# EAGLE board coil_havester_board (EAGLE 9.5.1)
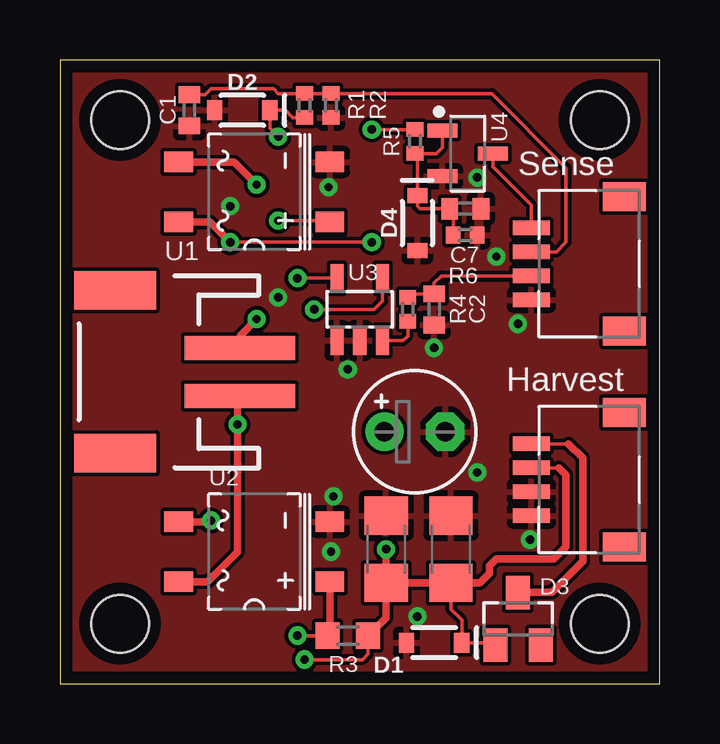
[diagram p0: board, top side]
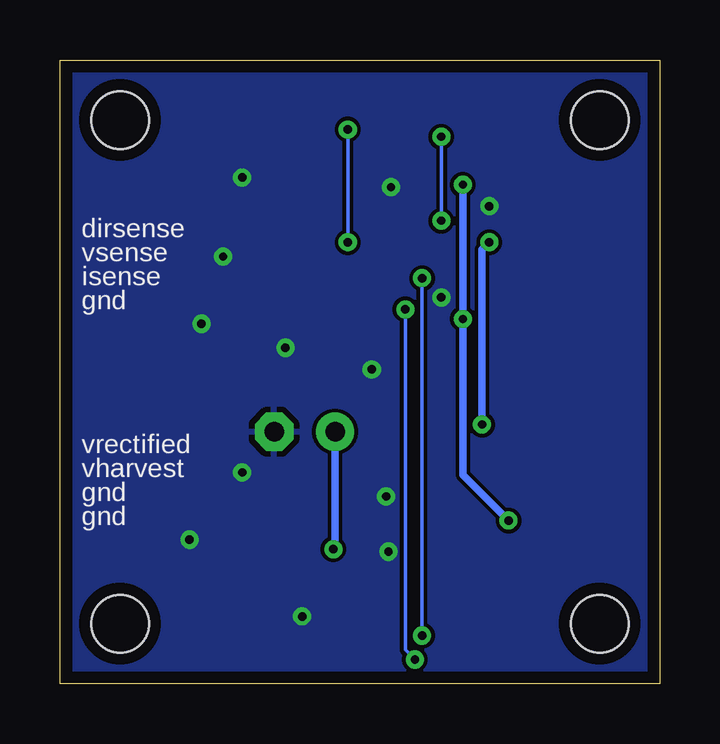
[diagram p1: board, bottom side, seen from below]

Size 25 x 26 mm. Coordinates in mm from the lower left corner, seen from the top.
Outline: 0,0 25,0 25,26 0,26 0,0
Copper layers (1*16): Top 0.035mm / dielectric 1.5mm / Bottom 0.035mm
Design rules "default *": minimum track width 6mil, minimum drill 0.35mm, track to track 6mil, track to pad 6mil, pad to pad 6mil, via to via 6mil, smd to smd 6mil, copper to edge 20mil, drill to drill 6mil, minimum pad ring 10mil, minimum via ring 8mil, stop-mask expansion 4mil, vias tented up to drill 0mil, thermal gap 10mil
Holes 2.4 mm at 2.5,23.5 2.5,2.5 22.5,2.5 22.5,23.5

## Footprints (pad centres in the part's own frame; a part is rotated, then mirrored left to right if it is on the bottom)
C0402 = smd 0.7 x 0.9: 1 -0.65,0; 2 0.65,0
C1206 = smd 1.6 x 1.8: 1 -1.4,0; 2 1.4,0
E2,5-5 = drill 0.813 pad 1.6: + -1.27,0 | drill 0.813 pad 1.6 octagon: - 1.27,0
SOD-323 = smd 0.63 x 0.83: A 1.15,0; C -1.15,0
SOT23 = smd 1 x 1.4: 1 -0.95,-1.1; 2 0.95,-1.1; 3 0,1.1
JST-2-SMD = smd 1 x 4.6: 1 -1,-3.7; 2 1,-3.7 | smd 1.6 x 3.4: NC1 -3.4,1.5; NC2 3.4,1.5
JST-SH-4 = smd 0.6 x 1.55: 1 -1.5,2.34; 2 -0.5,2.34; 3 0.5,2.34; 4 1.5,2.34 | smd 1.2 x 1.8: P-MOUNT1 -2.8,-1.535; P-MOUNT2 2.8,-1.535
R0402 = smd 0.6 x 0.7: 1 -0.5,0; 2 0.5,0
R0603 = smd 1 x 1.1: 1 -0.85,0; 2 0.85,0
CDBHDXX0L-G = smd 0.85 x 1.2: P$1 1.25,3.15; P$2 -1.25,3.15; P$3 -1.25,-3.15; P$4 1.25,-3.15
SOT23-5 = smd 0.55 x 1.2: 1 -0.95,-1.3; 2 0,-1.3; 3 0.95,-1.3; 4 0.95,1.3; 5 -0.95,1.3
TN2106K1-G = smd 1.24 x 0.589: D 1.056,0; G -1.056,0.95; S -1.056,-0.95

## Placement (x,y rotation side)
C1  1n  [C0402]  5.4,23.9 270 top
C2  1n  [C0402]  15.6,15.6 270 top
C3  [C1206]  13.6,5.6 90 top
C4  [C1206]  16.3,5.6 90 top
C5  DNP  [E2,5-5]  14.8,10.5 0 top
C7  10n  [C0402]  16.9,19.8 0 top
D1  3.3V  [SOD-323]  15.6,1.7 180 top
D2  3.3V  [SOD-323]  7.6,23.9 180 top
D3  BAT54  [SOT23]  19.1,2.7 0 top
D4  3.3V  [SOD-323]  14.9,19.2 270 top
J1  [JST-2-SMD]  3.8,13 90 top
JP2  JST-SH-4  [JST-SH-4]  22,8.5 90 top
JP3  JST-SH-4  [JST-SH-4]  22,17.5 90 top
R1  1M 1%  [R0402]  10.2,24.1 270 top
R2  150k 1%  [R0402]  11.3,24.1 90 top
R3  3.3 1%  [R0603]  12,2 0 top
R4  150k 1%  [R0402]  14.5,15.6 270 top
R5  10k  [R0402]  14.8,22.6 90 top
R6  150K 1%  [R0402]  16.9,18.7 180 top
U1  CDBHD140L-G  [CDBHDXX0L-G]  8.1,20.5 270 top
U2  CDBHD140L-G  [CDBHDXX0L-G]  8.1,5.5 270 top
U3  MAX9938  [SOT23-5]  12.5,15.6 0 top
U4  TN2106K1-G  [TN2106K1-G]  17,22.1 0 top

## Library data of the parts
C1 C2 = rcl; MFR: SAMSUNG; MFR_PN: CL05B102KB5NNNC; SPICEPREFIX: C
C3 C4 = rcl; MFR: TDK; MFR_PN: C3216X5R1E476M160AC; SPICEPREFIX: C
C5 = rcl; SPICEPREFIX: C
C7 = rcl; MFR: SAMSUNG; MFR_PN: CL05B103KB5NNNC; SPICEPREFIX: C
D1 D2 = SparkFun-DiscreteSemi; MFR: DIODES_INCORPORATED; MFR_PN: BZT52C15S; PROD_ID: DIO-11284
D3 = diode; MFR: ON; MFR_PN: BAT54
D4 = SparkFun-DiscreteSemi; MFR: DIODES_INCORPORATED; MFR_PN: BZT52C3V3S; PROD_ID: DIO-11284
J1 = SparkFun-Connectors; MFR: JST; MFR_PN: S2B-PH-SM4-TB(LF)(SN); PROD_ID: CONN-11443
JP2 JP3 = jst-sh; MFR: JST; MFR_PN: SM04B-SRSS-TB(LF)(SN)
R1 = rcl; MFR: YAGEO; MFR_PN: RC0402FR-071ML; SPICEPREFIX: R
R2 R4 R6 = rcl; MFR: YAGEO; MFR_PN: RC0402FR-07150KL; SPICEPREFIX: R
R3 = rcl; MFR: PANASONIC; MFR_PN: ERJ-3BQF3R3V; SPICEPREFIX: R
R5 = rcl; MFR: YAGEO; MFR_PN: RC0402FR-0710KL; SPICEPREFIX: R
U1 U2 = afig-0007; MFR: COMCHIP; MFR_PN: CDBHD140L-G
U3 = max9938; MFR: MAXIM; MFR_PN: MAX9938TEUK+T
U4 = tn2106; MFR: MICROCHIP; MFR_PN: TN2106K1-G

## Nets
DIRSENSE: JP3.4 U4.D
GND: C1.2 C2.2 C3.2 C4.2 C5.- C7.2 D1.A D2.A D4.A JP2.1 JP2.2 JP3.1 R2.1 R6.1 U1.P$2 U2.P$2 U3.1 U3.2 U4.S
ISENSE: C2.1 JP3.2 R4.1
N$1: J1.1 R5.2 U1.P$4 U2.P$4
N$2: J1.2 U1.P$3 U2.P$3
N$3: D2.C R1.2 U1.P$1
N$4: R3.1 U2.P$1 U3.5
N$6: R4.2 U3.3
N$7: C7.1 D4.C R5.1 R6.2 U4.G
VHARVEST: C3.1 C4.1 C5.+ D1.C D3.1 JP2.3 R3.2 U3.4
VHARVEST_R: D3.3 JP2.4
VSENSE: C1.1 JP3.3 R1.1 R2.2

## Tracks (layer width: path | path; a pad name or v marks a point on that pad's centre or on a via)
DIRSENSE
  Top 0.152: U4.D 18.06,21.54 19.66,19.94 JP3.4
GND  (via drill 0.35)
  other vias: 11.4,7.8 12,13.1 15.6,14 19.1,15 17.4,8.8 19.6,6 17.4,21.1 11.2,20.7 11.3,5.5 18.2,17.8 14.9,2.8 7.1,19.9 9.1,16.1
  pour Top: -1,27 26,27 26,-1 -1,-1
  pour Bottom: 26,27 -1,27 -1,-1 26,-1
ISENSE
  Top 0.152: R4.1 14.65,16.25 C2.1 15.6,16.7 15.9,17 JP3.2
N$1  (via drill 0.35)
  Top 0.152: R5.2 v13,23.1 | v7.1,18.4 v13,18.4
  Top 0.305: U2.P$4 6.15,4.25 7.4,5.5 v7.4,10.8 7.4,12 J1.1 | U1.P$4 6.25,19.25 v7.1,18.4
  Bottom 0.152: v13,18.4 v13,23.1
  Bottom 0.305: v7.1,18.4 7.4,18.1 v7.4,10.8
N$2  (via drill 0.35)
  Top 0.305: U1.P$3 7.25,21.75 v8.2,20.8 | U2.P$3 6.25,6.75 v6.3,6.8 | J1.2 7.5,14.5 v8.2,15.2
  Bottom 0.305: v6.3,6.8 8.2,8.7 v8.2,15.2 v8.2,20.8
N$3  (via drill 0.35)
  Top 0.152: U1.P$1 11.2,19.3 v9.1,19.3 | v9.1,22.8 8.75,23.15 D2.C 9.4,23.9 9.7,23.6 R1.2
  Bottom 0.152: v9.1,22.8 v9.1,19.3
N$4  (via drill 0.35)
  Top 0.152: R3.1 v9.9,2 | v9.9,16.9 U3.5
  Top 0.305: U2.P$1 11.25,2.1 R3.1
  Bottom 0.152: v9.9,2 v9.9,16.9
N$6
  Top 0.152: U3.3 14.3,14.3 14.5,14.5 R4.2
N$7
  Top 0.152: U4.G 15.94,22.34 15.7,22.1 R5.1 14.9,22 D4.C 14.9,19.9 15,19.8 C7.1 16.4,19.65 R6.2
VHARVEST  (via drill 0.35)
  Top 0.152: R3.2 12.85,1.24 12.61,1 v10.2,1 | v10.6,15.6 13.1,15.6 13.45,15.95 U3.4 | C4.1 16.3,3.1 16.75,2.65 D1.C 18.05,1.7 D3.1 | JP2.3 20.8,9
  Top 0.305: C3.1 13.6,2.75 R3.2 | C3.1 C4.1 | 16.35,4.25 C4.1 | C3.1 v13.6,5.6 | 20.8,9 21.1,8.7 21.1,5.7 20.6,5.2 18.2,5.2 17.9,4.9 17.9,4.6 17.5,4.2 C4.1
  Bottom 0.152: v10.2,1 10.6,1.4 v10.6,15.6
  Bottom 0.305: v13.6,5.6 13.53,5.67 C5.+
VHARVEST_R
  Top 0.152: JP2.4 21.2,10
  Top 0.305: D3.3 20.5,3.8 21.8,5.1 21.8,9.4 21.2,10
VSENSE
  Top 0.152: 5.45,24.6 C1.1 6.05,24.55 6.3,24.8 8.9,24.8 9.1,24.6 R1.1 R2.2 18,24.6 21.1,21.5 21.1,18.4 20.7,18 JP3.3

## Text on the board
tPlace: Sense | Harvest
bPlace: dirsense | vsense | isense | gnd | vrectified | vharvest | gnd | gnd